# Altium PCB YNM-3000-1.PcbDoc
Units mm, origin at the board's own origin, x right, y up, seen from the top; angles counter-clockwise.
Board outline 136.68 x 73.5 mm, 2 copper layers (Top Layer, Bottom Layer); 35 components, 27 nets, 231 pads, 28 vias.
Unrouted connection lines stored in the file: 3.
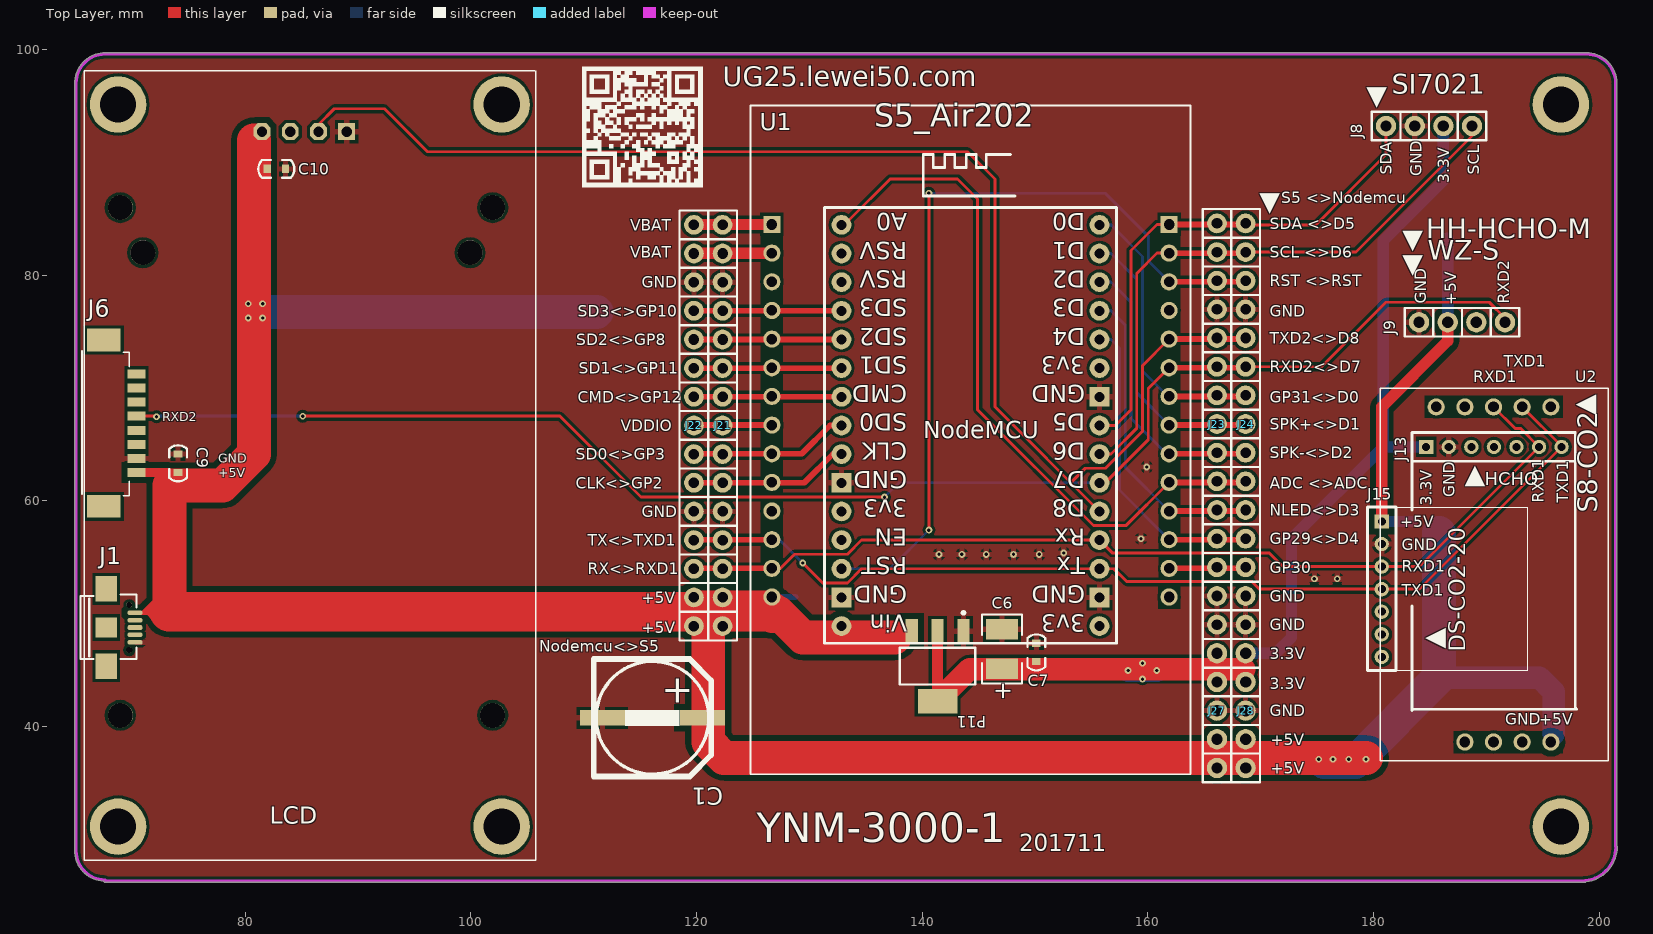
[diagram p0: Top Layer view]
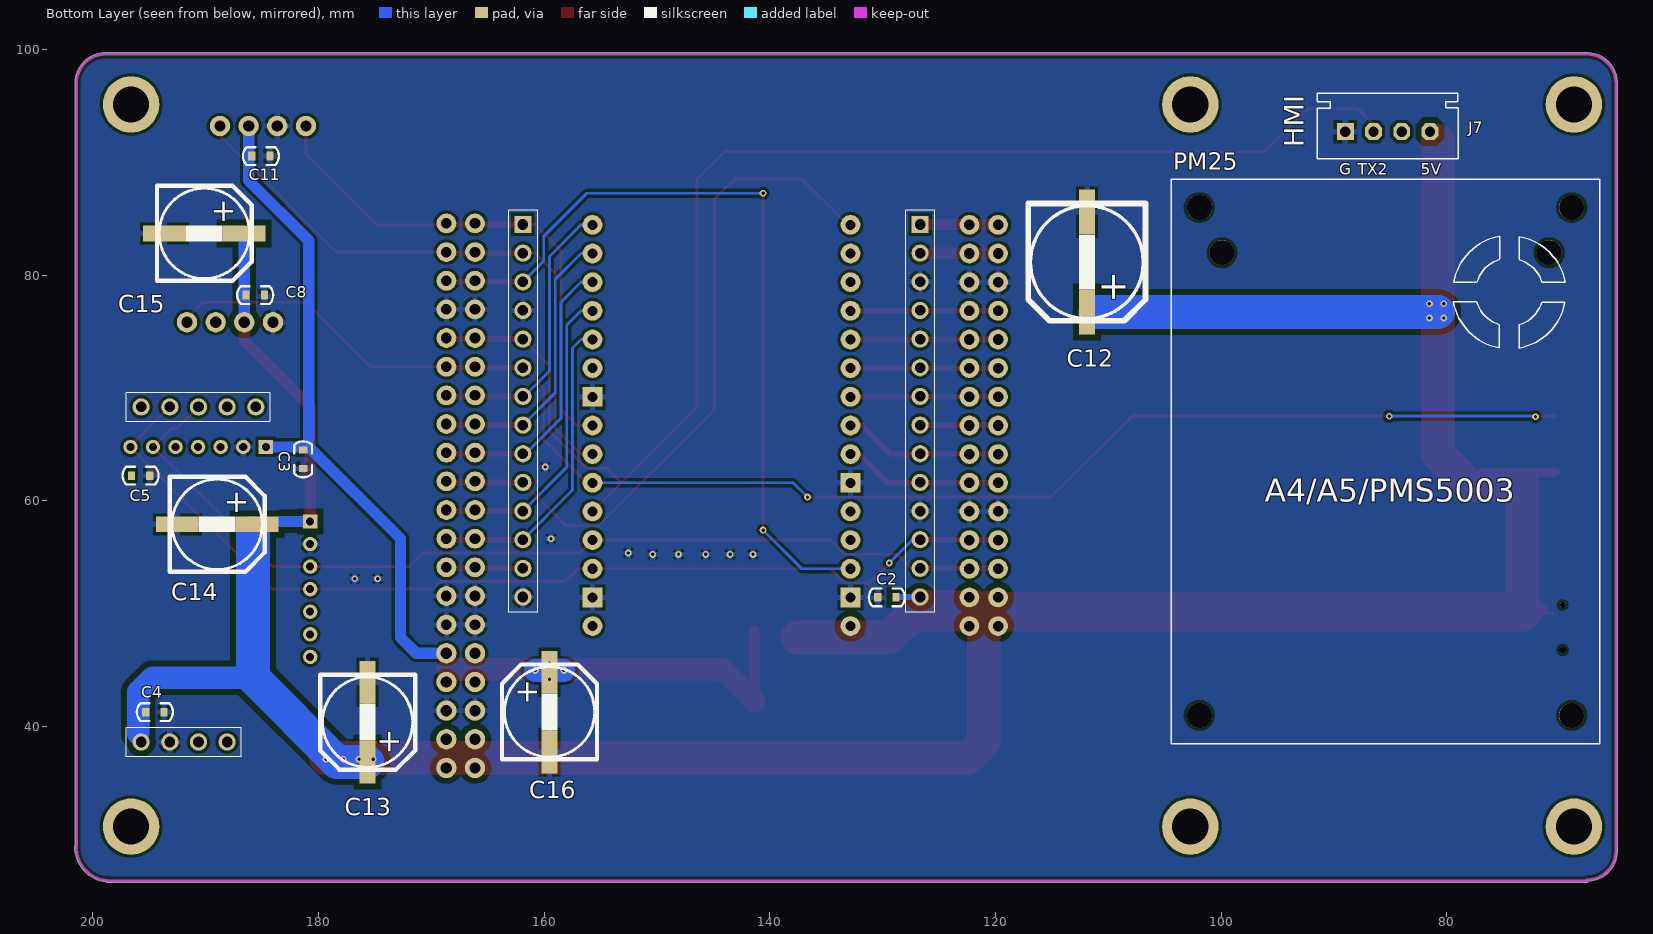
[diagram p1: Bottom Layer view, seen from below]
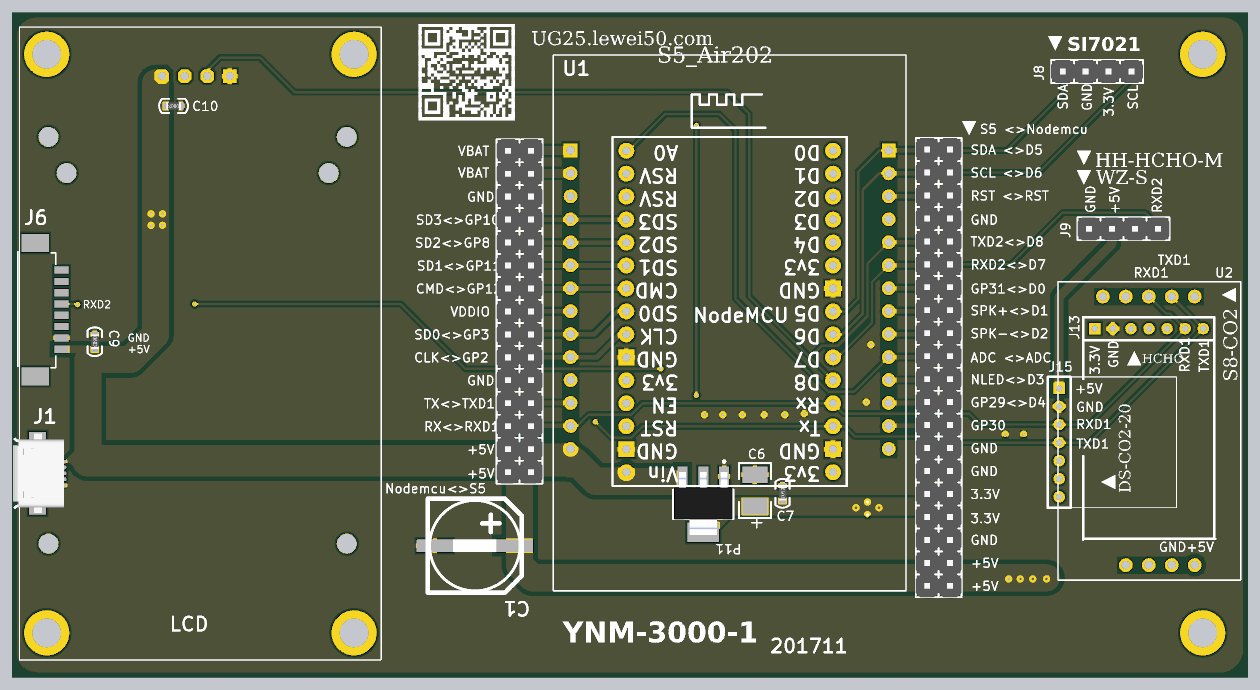
[diagram p2: 3D render of the assembled board from above, using the file's embedded part models]
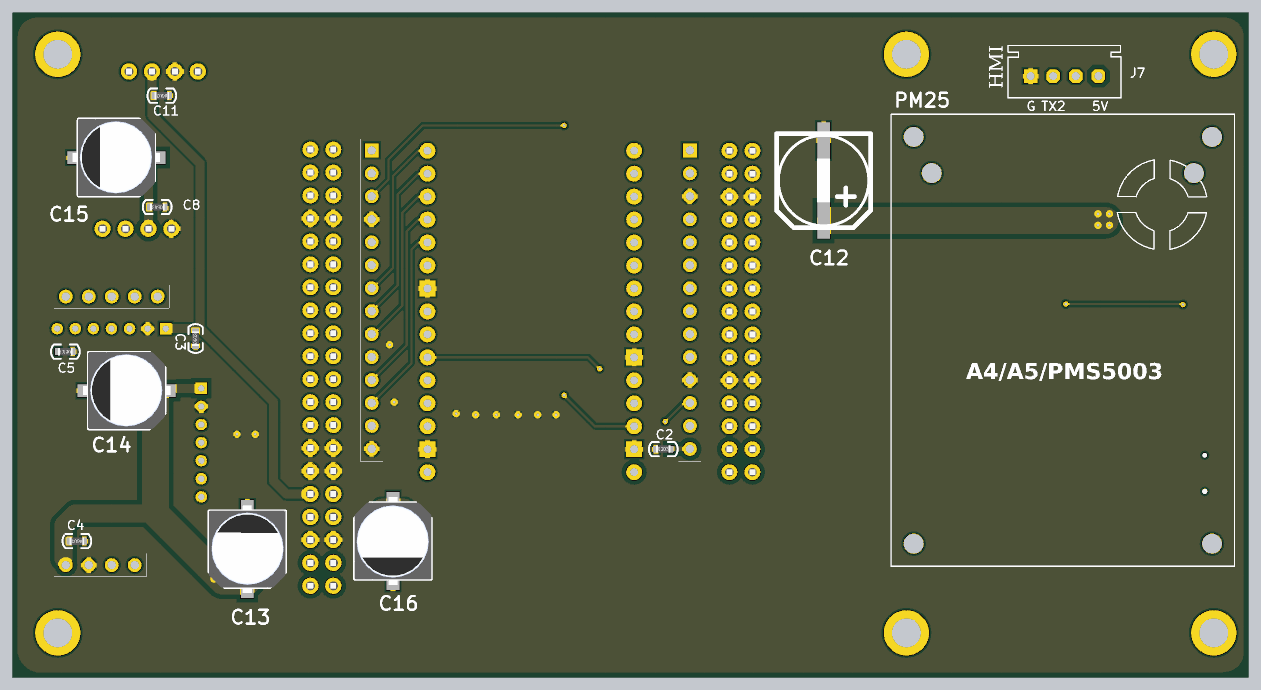
[diagram p3: 3D render of the assembled board from below, using the file's embedded part models]

## Layer stack, top to bottom
Top Solder: solder mask 0.0102, Solder Resist, Dk 3.5
Top Layer: signal copper 0.0356
Dielectric 1: dielectric 0.32, FR-4, Dk 4.8
Bottom Layer: signal copper 0.0356
Bottom Solder: solder mask 0.0102, Solder Resist, Dk 3.5

## Board outline
64.902,28.794 cw(c65.024,28.829) 64.897,28.829 64.897,97.155 cw(c65.024,97.155) 64.902,97.19 cw(c67.564,97.028) 67.402,99.69 cw(c67.437,99.568) 67.437,99.695 198.882,99.695 cw(c198.882,99.568) 198.887,99.695 cw(c198.882,97.028) 201.549,97.085 cw(c201.435,97.028) 201.562,97.028 201.562,29.395 cw(c201.453,29.329) 201.58,29.329 cw(c198.451,29.329) 198.828,26.222 cw(c198.755,26.327) 198.755,26.2 67.564,26.2 cw(c67.564,26.327) 67.442,26.291 cw(c67.564,28.956)

## Design rules (kind name [scope] priority, off if disabled: settings)
Clearance RS485-B2 [InNet('RS485-B')] p1: gap=0.508
Clearance RS485-A2 [InNet('RS485-A')] p2: gap=0.508
Clearance VCC [InNet('+5V') vs InNet('GND')] p3: gap=0.508
Clearance Clear24V [InNet('POW') vs InNet('GND')] p4: gap=0.508
Clearance [All] p5: gap=0.254
HoleSize [All] p1: absolutevalues=TRUE maxlimit=5 minlimit=0.025 maxpercent=80.000 minpercent=20.000
MinimumSolderMaskSliver [All] p1: minsoldermaskwidth=0.2
PolygonConnect [All] p1: connectstyle=Relief reliefconductorwidth=0.508 reliefentries=4 polygonreliefangle="90 Angle" airgapwidth=0.254
RoutingVias [All] p1: holewidth=0.711 width=1.27 viastyle="Through Hole" minholewidth=0.711 minwidth=1.27 maxholewidth=0.711 maxwidth=1.27
SilkToSilkClearance [All] p1: silktosilkclearance=0.17
SilkToSolderMaskClearance [IsPad] p1: minsilkscreentomaskgap=0 clearancetoexposedcopper=TRUE
SolderMaskExpansion [All] p1: expansion=0.102
UnpouredPolygon [All] p1: allowunpoured=FALSE
Width Net1_1 [InNet('NetL1_1')] p1: maxlimit=3 minlimit=0.254 preferedwidth=0.508
Width 5V [InNet('5V')] p2: maxlimit=1.5 minlimit=0.5 preferedwidth=1
Width RXD [InNet('RXD')] p3: maxlimit=1.1 minlimit=0.254 preferedwidth=0.508
Width TXD [InNet('TXD')] p4: maxlimit=1.1 minlimit=0.254 preferedwidth=0.508
Width C-TXD [InNet('C-TXD')] p5: maxlimit=1.1 minlimit=0.254 preferedwidth=0.508
Width C-RXD [InNet('C-RXD')] p6: maxlimit=1.1 minlimit=0.254 preferedwidth=0.508
Width RS485-B [InNet('RS485-B')] p7: maxlimit=1.1 minlimit=0.5 preferedwidth=0.508
Width RS485-A [InNet('RS485-A')] p8: maxlimit=1.1 minlimit=0.5 preferedwidth=0.508
Width RS485-D [InNet('RS485-D')] p9: maxlimit=1.1 minlimit=0.5 preferedwidth=0.508
Width 3.3V [InNet('3.3V')] p10: maxlimit=2 minlimit=0.254 preferedwidth=0.5
Width RAW [InNet('RAW')] p11: maxlimit=3 minlimit=0.508 preferedwidth=1
Width 24V [InNet('24V')] p12: maxlimit=3 minlimit=1 preferedwidth=1
Width GND [InNet('GND')] p13: maxlimit=3 minlimit=0.254 preferedwidth=0.508
Width [All] p14: maxlimit=4 minlimit=0.254 preferedwidth=0.254
25 further rules are at their usual default settings.

## Components (designator, comment, footprint, x,y, rotation, side; value= is the part's Value field where it differs from the comment)
C1 "1000UF" SMD-EC-F10 116.078,40.767 r180 top
C2 "104" CAP-SMD-0603 130.429,51.435 r180 bottom
C3 "104" CAP-SMD-0603 181.356,62.865 r90 bottom
C4 "104" CAP-SMD-0603 193.675,41.275 r0 bottom
C5 "104" CAP-SMD-0603 194.945,62.23 r0 bottom
C6 "106" EC3528B 147.066,46.863 r90 top
C7 "104" CAP-SMD-0603 150.114,47.371 r270 top
C8 "104" CAP-SMD-0603 184.785,78.232 r0 bottom
C9 "104" CAP-SMD-0603 74.041,64.135 r270 top
C10 "104" CAP-SMD-0603 83.566,89.408 r180 top
C11 "104" CAP-SMD-0603 184.277,90.551 r0 bottom
C12 "1000UF" SMD-EC-F10 111.887,81.153 r90 bottom
C13 "470uF/16V" SMD-EC-F8 175.641,40.386 r90 bottom
C14 "470uF/16V" SMD-EC-F8 188.976,57.912 r0 bottom
C15 "470uF/16V" SMD-EC-F8 190.119,83.693 r0 bottom
C16 "470uF/16V" SMD-EC-F8 159.512,41.275 r270 bottom
J1 "USB_M" USB_MICRO 67.691,48.768 r270 top
J6 "DIP-1X08" 1.27*8 70.358,71.247 r270 top
J7 "DIP-1X04" XH-1X04-2.5 88.987,92.71 r180 bottom
J8 "SIP4" DB-1X4 181.102,93.218 r180 top
J9 "SIP4" DB-1X4 184.023,75.819 r180 top
J13 "SIP7_2.0" SIP_2.0_7P 184.658,64.77 r0 top
J15 "SIP7_2.0" SIP_2.0_7P 180.721,58.166 r270 top
J21 "SIP15-1.753" DB-1X15-1.753 122.301,71.755 r270 top
J22 "SIP15-1.753" DB-1X15-1.753 119.761,71.755 r270 top
J23 "SIP15-1.753" DB-1X15-1.753 166.116,71.882 r270 top
J24 "SIP15-1.753" DB-1X15-1.753 168.656,71.882 r270 top
J27 "SIP5" DB-1X5 166.116,41.402 r270 top
J28 "SIP5" DB-1X5 168.656,41.402 r270 top
LCD "LCD" LCD 85.725,63.119 r0 top
NodeMCU "NodeMCU DevKit v1.0" "NodeMCU DevKit v1.0 - Inside Labels" 155.702,48.895 r180 top
P11 "LM1117-3.3" SOT-223 141.351,45.339 r180 top
PM25 "PM25_3" PM25_3 104.421,38.481 r180 bottom
U1 "S5" S5 144.272,69.088 r0 top
U2 "S8-0053" S8-0053 195.707,53.467 r270 top

## Footprints (in the part's own frame and the unit in brackets; to place one, negate y for a bottom-side part, rotate by r counter-clockwise, add the part's x,y. Pads: shape width x height; smd on the part's side, far side on the other; paste and mask are expansions set on the pad)
1.27*8 [mm]
  rect 0.8x1.6 smd: 1(8.75,0) 2(7.5,0) 3(6.25,0) 4(5,0) 5(3.75,0) 6(2.5,0) 7(1.25,0) 8(0,0)
  rect 2x3 smd: ""(-3,-2.9) ""(11.75,-2.9)
  silkscreen extent -2.03,-4.83 10.79,-0.63
CAP-SMD-0603 [mil]
  rect 25x30 smd: 1(0,0) 2(64,0)
  silkscreen extent -31,-31 95,31, body extent 0,-15 63,16, height 18
DB-1X4 [mm]
  round 1.8 hole 1: 1(-7.62,0) 2(-5.08,0) 3(-2.54,0) 4(0,0)
  silkscreen extent -8.89,-1.27 1.27,1.27, body extent -8.89,-1.27 1.27,1.27, height 2.5
DB-1X5 [mm]
  round 1.8 hole 1: 1(-5.08,0) 2(-2.54,0) 3(0,0) 4(2.54,0) 5(5.08,0)
  silkscreen extent -6.35,-1.27 6.35,1.27, body extent -6.35,-1.27 6.35,1.27, height 2.5
DB-1X15-1.753 [mm]
  round 1.753 hole 0.94: 1(-12.7,0) 2(-10.16,0) 3(-7.62,0) 4(-5.08,0) 5(-2.54,0) 6(0,0) 7(2.54,0) 8(5.08,0) 9(7.62,0) 10(10.16,0) 11(12.7,0) 12(15.24,0) 13(17.78,0) 14(20.32,0) 15(22.86,0)
  silkscreen extent -13.97,-1.27 24.13,1.27, body extent -13.97,-1.27 24.13,1.27, height 2.5
EC3528B [mm] "B型钽电容"
  rect 1.8x2.8 smd: 1(-1.75,0) 2(1.75,0)
  silkscreen extent -3.05,-1.78 3.05,1.78
LCD [mm]
  round 5 hole 3.2: ""(-17,-32) ""(-17,32) ""(17,-32) ""(17,32)
  silkscreen extent -20,-35 20,35
"NodeMCU DevKit v1.0 - Inside Labels" [mil]
  round 69 hole 35: 1(0,0) 3(0,-200) 4(0,-300) 5(0,-400) 6(0,-500) 7(0,-600) 8(0,-700) 10(0,-900) 11(0,-1000) 12(0,-1100) 13(0,-1200) 14(0,-1300) 15(0,-1400) 16(900,-1400) 17(900,-1300) 18(900,-1200) 19(900,-1100) 20(900,-1000) 21(900,-900) 22(900,-800) 23(900,-700) 24(900,-600) 26(900,-400) 27(900,-300) 28(900,-200) 30(900,0)
  rect 69x69 hole 35: 2(0,-100) 9(0,-800) 25(900,-500) 29(900,-100)
  silkscreen extent -60,-1460 960,60
PM25_3 [mm]
  round 2.2 hole 2.2: ""(2.5,2.5) ""(2.5,47.5) ""(4.5,43.5) ""(33.5,43.5) ""(35.5,2.5) ""(35.5,47.5)
  silkscreen extent 0,0 38,50
S5 [mil]
  rect 60x60 hole 37: 1(-692.91,606.3) 28(692.91,606.3)
  round 60 hole 37: 2(-692.91,506.3) 3(-692.91,406.3) 4(-692.91,306.3) 5(-692.91,206.3) 6(-692.91,106.3) 7(-692.91,6.3) 8(-692.91,-93.7) 9(-692.91,-193.7) 10(-692.91,-293.7) 11(-692.91,-393.7) 12(-692.91,-493.7) 13(-692.91,-593.7) 14(-692.91,-693.7) 15(692.91,-693.7) 16(692.91,-593.7) 17(692.91,-493.7) 18(692.91,-393.7) 19(692.91,-293.7) 20(692.91,-193.7) 21(692.91,-93.7) 22(692.91,6.3) 23(692.91,106.3) 24(692.91,206.3) 25(692.91,306.3) 26(692.91,406.3) 27(692.91,506.3)
  Top Layer pour cut-out: 654.49,645.67 731.26,645.67 731.26,-735 654.49,-735
  Top Layer pour cut-out: -731.26,645.67 -654.49,645.67 -654.49,-735 -731.26,-735
  silkscreen extent -768,-1312 768,1022
S8-0053 [mil]
  round 60 hole 37: 1(-584.65,0) 2(-584.65,-100) 3(-584.65,-200) 4(-584.65,-300) 5(-584.65,-400) 6(584.65,-300) 7(584.65,-200) 8(584.65,-100) 9(584.65,0)
  Top Layer pour cut-out: 622.99,-339.37 546.22,-339.37 546.22,41.3 622.99,41.3
  Top Layer pour cut-out: -546.22,-439.37 -622.99,-439.37 -622.99,41.3 -546.22,41.3
  silkscreen extent -650,-595 650,200
SIP_2.0_7P [mil]
  rect 50x50 hole 28: 1(0,0)
  round 50 hole 28: 2(78.74,0) 3(157.48,0) 4(236.22,0) 5(314.96,0) 6(393.7,0) 7(472.44,0)
  silkscreen extent -50,-50 520,50
SMD-EC-F8 [mm]
  rect 3.8x1.4 smd: 1(-3.525,0) 2(3.525,0)
  silkscreen extent -4.21,-4.22 4.19,4.2, body extent -4.85,-4.25 4.85,4.25, height 10.5
SMD-EC-F10 [mm]
  rect 4x1.4 smd: 1(-4.43,0) 2(4.43,0)
  silkscreen extent -5.21,-5.2 5.19,5.2
SOT-223 [mm] "SOT-223/SC-73; 4 Leads; Body 6.7 x 7.3 mm, inc. leads (LxW max)"
  rect 1.1x2.15 smd: 1(-2.3,-3.1) 2(0,-3.1) 3(2.3,-3.1)
  rect 3.5x2.15 smd: 4(0,3.1)
  silkscreen extent -3.35,-4.85 3.35,1.63, body extent -3.25,-3.58 3.25,3.38, height 1.65
USB_MICRO [mm] "USB方孔"
  round 0.5 hole 0.5: 0(-2,2.032)
  round 0.5 hole 0.56: 0(2,2.032)
  oct 0.4x1.35 smd: 1(-1.3,2.54) 2(-0.65,2.54) 3(0,2.54) 4(0.65,2.54) 5(1.3,2.54)
  rect 2.286x1.9 smd: 6(3.429,0) 7(-3.429,0)
  rect 1.8x1.9 smd: 8(0,0)
  silkscreen extent -2.92,-2.29 2.79,2.67, body extent -4.4,-2.68 4.4,2.92, height 2.74
XH-1X04-2.5 [mm]
  rect 1.5x1.5 hole 0.9: 1(0,0)
  oct 1.5x1.5 hole 0.9: 2(2.5,0) 3(5,0) 4(7.5,0)
  silkscreen extent -2.5,-2.4 10,3.4

## Part data
C1 C12: library part SMD-EC-F10, "体积（10*10.2MM）"
C2 C3 C4 C5 C7 C8 C9 C10 C11: library part Cap0603, "Cap0603"
C6: library part CAP-3528, "CAP-3528"
C13 C14 C15 C16: library part SMD-EC-F8, "体积（8*10.2MM）"
J1: "Micro/Mini USB"
J6: "Header, 8-Pin"
J7: "Header, 4-Pin"
P11: library part LM1117

## Free pads (board coordinates)
  round 5 hole 3.2: ""(196.596,31.119) ""(196.596,95.119)

## Via types
v1: diameter 0.6, hole 0.3, Top Layer to Bottom Layer, 28 vias

## Nets (pads, with @x,y where several pads share a name; then routed paths per layer and width w, separated by ;. In a path a pad name is that pad's centre, name@x,y a point inside that pad or via, vN(x,y) a via of type N, cw(c..) or ccw(c..) an arc to the next point about the centre after c; other vN are vias at no path point)
+3.3V: C3.2 C5.2 C6.1 C7.2 C11.2 C16.1 J8.2 J13.1 J27.1 J27.2 J28.1 J28.2 P11.2 P11.4 | length 101.5
  Top Layer w1: P11.4 P11.2 ; J27.2 J27.1 ; J28.2 J28.1
  Top Layer w2: P11.4 144.197,45.085 160.782,45.085 168.529,45.085
  Bottom Layer w1: J28.1 171.323,46.482 172.72,47.879 172.72,56.642 180.848,64.77 ; J13.1 180.848,64.77 ; J8.2 186.182,88.392 180.848,83.058 180.848,64.77
  Bottom Layer w2: v1(158.242,44.958) v1(160.782,44.958)
  other v1: 159.512,44.196 159.512,45.593
+5V: C1.1 C2.2 C4.2 C8.2 C9.2 C10.2 C12.1 C13.1 C14.1 C15.1 J1.1 J6.1 J7.4 J9.3 J15.1 J21.14 J21.15 J22.14 J22.15 J27.4 J27.5 J28.4 J28.5 NodeMCU.30 P11.3 U1.14 U2.9 | length 316.3
  Top Layer w0.35: J1.1@70.642,50.068 72.928,50.068 ; J1.1@70.896,50.068 72.136,51.308 ; 71.374,50.038 71.882,49.53
  Top Layer w0.8: J6.1 73.279,62.497
  Top Layer w1: J21.14 122.301,50.165 J21.15 128.397,48.895 NodeMCU.30 ; J27.5 J27.4 ; J15.1 180.721,68.326 186.563,74.168 J9.3
  Top Layer w1.2: J22.14@119.794,51.468 U1.14
  Top Layer w3: 73.279,50.419 73.279,61.341 77.978,61.341 80.772,64.135 80.772,91.948 ; 121.031,50.165 121.031,38.608 122.428,37.211 v1@179.324,37.211 ; 126.746,50.038 127.254,50.038 128.397,48.895 129.413,47.879 137.541,47.879
  Top Layer w3.5: 73.279,50.165 122.301,50.165 126.619,50.165 126.746,50.038
  Bottom Layer w0.508: U1.14 C2.2@128.77,51.468
  Bottom Layer w1: J15.1 183.388,58.166 ; J9.3 C15.1@186.563,83.281
  Bottom Layer w2: 185.801,44.323 194.691,44.323 195.961,43.053 195.961,39.37
  Bottom Layer w3: 80.757,76.723 111.125,76.723 ; C13.1 178.339,36.861 185.801,44.323 185.801,57.15
  other v1: 175.133,37.084 176.403,37.084 177.8,37.084 179.324,37.084 80.264,76.2 81.534,76.2 80.264,77.47 81.534,77.47
ADC: J23.10 J24.10 NodeMCU.16 U1.19 | length 62.2
  Top Layer w0.254: NodeMCU.16@133.512,84.455 133.512,84.871 137.16,88.519 143.129,88.519 144.907,86.741 144.907,68.072 155.181,57.798 158.016,57.798 158.029,57.785 U1.19
  Top Layer w0.508: U1.19 J24.10@168.562,61.628
CLK: J21.10 J22.10 NodeMCU.24 U1.10 | length 14.1
  Top Layer w0.508: J22.10 J21.10 129.54,61.595 132.08,64.135 NodeMCU.24
CMD: J21.7 J22.7 NodeMCU.22 U1.7 | length 13.1
  Top Layer w0.508: J22.7 J21.7 NodeMCU.22
D0: J23.7 J24.7 NodeMCU.15 U1.22 | length 25.1
  Top Layer w0.508: U1.22 J24.7@168.562,69.248
  Bottom Layer w0.254: NodeMCU.15 156.718,84.455 159.512,81.661 159.512,71.501 U1.22@161.819,69.194
D1: J23.8 J24.8 NodeMCU.14 U1.21 | length 25
  Top Layer w0.508: U1.21 J24.8@168.562,66.708
  Bottom Layer w0.254: NodeMCU.14 156.718,81.915 159.004,79.629 159.004,69.576 U1.21
D2: J23.9 J24.9 NodeMCU.13 U1.20 | length 25.4
  Top Layer w0.508: U1.20 J24.9@168.562,64.168
  Bottom Layer w0.254: NodeMCU.13 156.718,79.375 158.496,77.597 158.496,67.31 U1.20@161.925,63.881
D3: J23.11 J24.11 NodeMCU.12 U1.18 | length 27.6
  Top Layer w0.508: U1.18 J24.11@168.562,59.088
  Bottom Layer w0.254: NodeMCU.12 156.718,76.835 157.988,75.565 157.988,62.972 U1.18
EN: NodeMCU.27
GND: C1.2 C2.1 C3.1 C4.1 C5.1 C6.2 C7.1 C8.1 C9.1 C10.1 C11.1 C12.2 C13.2 C14.2 C15.2 C16.2 J1.5 J6.2 J7.1 J8.3 J9.4 J13.2 J15.2 J21.3 J21.11 J22.3 J22.11 J23.4 J23.14 J23.15 J24.4 J24.14 J24.15 J27.3 J28.3 NodeMCU.2 NodeMCU.9 NodeMCU.25 NodeMCU.29 P11.1 U1.3 U1.11 U1.15 U1.25 U2.8
  other v1: 174.752,53.086 176.784,53.086 141.478,55.245 143.51,55.245 145.669,55.245 148.082,55.245 150.368,55.245 152.527,55.372 159.385,56.642 159.893,62.992
GP3: J21.9 J22.9 NodeMCU.23 U1.9 | length 14.1
  Top Layer w0.508: J22.9@119.794,64.168 U1.9 129.319,64.168 131.826,66.675 NodeMCU.23
GPIO29: J23.12 J24.12 NodeMCU.11 U1.17 | length 27.6
  Top Layer w0.508: U1.17 J24.12@168.562,56.548
  Bottom Layer w0.254: NodeMCU.11 156.718,74.295 157.48,73.533 157.48,60.94 U1.17
GPIO30: J23.13 J24.13 U1.16 | length 6.7
  Top Layer w0.508: U1.16 J24.13@168.562,54.008
RST: J23.3 J24.3 NodeMCU.28 U1.26 | length 71.5
  Top Layer w0.254: v1(140.589,57.404) v1(140.589,87.249)
  Top Layer w0.508: U1.26 J24.3@168.562,79.408
  Bottom Layer w0.254: NodeMCU.28 137.16,53.975 v1(140.589,57.404) ; v1(140.589,87.249) 156.219,87.249 160.02,83.448 160.02,81.26 U1.26
RSV: NodeMCU.17 NodeMCU.18
RXD1: J13.6 J15.3 J21.13 J22.13 NodeMCU.4 U1.13 U2.3 | length 86.8
  Top Layer w0.254: U1.13 127.414,54.008 128.664,55.258 133.363,55.258 134.62,56.515 NodeMCU.4 156.828,55.389 ; 156.828,55.372 170.752,55.372 171.958,54.166 J15.3 184.054,54.166 J13.6 193.007,66.421 192.523,66.421 U2.3 ; J13.6@194.301,64.643 J13.6@194.31,64.643
  Top Layer w0.508: J22.13@119.794,54.008 U1.13
RXD2: J6.5 J9.1 J23.6 J24.6 NodeMCU.6 U1.23 | length 134.8
  Top Layer w0.254: J6.5 v1@72.076,67.497 ; v1(85.09,67.497) 107.89,67.497 115.062,60.325 v1(136.652,60.325) ; NodeMCU.6 156.21,61.595 160.02,65.405 160.02,69.936 U1.23 ; J24.6 175.387,71.882 181.102,77.597 190.246,77.597 191.643,76.2 J9.1
  Top Layer w0.508: U1.23 J24.6@168.562,71.788
  Bottom Layer w0.254: v1@72.196,67.497 v1(85.09,67.497) ; v1(136.652,60.325) 137.922,61.595 NodeMCU.6
  other v1: 72.136,67.437
SCL: J8.1 J23.2 J24.2 NodeMCU.7 U1.27 | length 53.5
  Top Layer w0.254: NodeMCU.7 156.718,64.135 159.004,66.421 159.004,80.137 160.815,81.948 U1.27 ; J24.2 178.435,82.042 188.722,92.329 J8.1
  Top Layer w0.508: U1.27 J24.2@168.562,81.948
SD1: J21.6 J22.6 NodeMCU.21 U1.6 | length 13.1
  Top Layer w0.508: J22.6 J21.6 NodeMCU.21
SD2: J21.5 J22.5 NodeMCU.20 U1.5 | length 13.1
  Top Layer w0.508: J22.5 J21.5 NodeMCU.20
SD3: J21.4 J22.4 NodeMCU.19 U1.4 | length 13.1
  Top Layer w0.508: J22.4 J21.4 NodeMCU.19
SDA: J8.4 J23.1 J24.1 NodeMCU.8 U1.28 | length 46.1
  Top Layer w0.254: NodeMCU.8 157.099,66.675 158.496,68.072 158.496,82.169 160.815,84.488 U1.28 ; J24.1@168.595,84.455 174.879,84.455 181.102,90.678 J8.4
  Top Layer w0.508: U1.28 J24.1@168.562,84.488
TXD1: J13.7 J15.4 J21.12 J22.12 NodeMCU.3 U1.12 U2.2 | length 89.9
  Top Layer w0.254: v1(129.413,54.483) 131.178,52.718 133.363,52.718 134.62,53.975 NodeMCU.3 156.972,53.975 158.115,52.832 169.198,52.832 169.864,52.166 J15.4 184.054,52.166 J13.7 ; U2.2 J13.7@196.686,64.798
  Top Layer w0.508: J22.12@119.794,56.548 U1.12
  Bottom Layer w0.254: U1.12 127.348,56.548 v1(129.413,54.483)
TXD2: J7.2 J23.5 J24.5 NodeMCU.5 U1.24 | length 121.1
  Top Layer w0.254: J7.2 86.487,93.345 87.884,94.742 92.329,94.742 96.139,90.932 144.018,90.932 146.431,88.519 146.431,68.326 NodeMCU.5 ; 153.162,61.595 154.445,62.878 156.223,62.878 159.512,66.167 159.512,71.968 U1.24
  Top Layer w0.508: U1.24 J24.5@168.562,74.328
VBAT: J21.1 J21.2 J22.1 J22.2 U1.1 U1.2 | length 13.8
  Top Layer w1: J22.2@119.794,81.948 U1.2 ; J22.1@119.794,84.488 U1.1
VDDIO: J21.8 J22.8 U1.8 | length 6.9
  Top Layer w0.508: J22.8@119.794,66.708 U1.8
pads on no net: J1.0 J1.2 J1.3 J1.4 J1.6 J1.7 J1.8 J6. J6.3 J6.4 J6.6 J6.7 J6.8 J7.3 J9.2 J13.3 J13.4 J13.5 J15.5 J15.6 J15.7 LCD. NodeMCU.1 NodeMCU.10 NodeMCU.26 PM25. U2.1 U2.4 U2.5 U2.6 U2.7

## Polygon pours and split planes (outlines as drawn)
GND on Bottom Layer "Bottom Layer-No Net" (solid, remove dead copper, pour order 6): 209.55,103.886 209.169,104.267 59.436,104.267 59.436,15.748 57.531,13.843 61.976,18.288 210.947,18.288
GND on Top Layer "Bottom Layer-No Net" (solid, remove dead copper, pour order 8): 56.261,103.378 207.645,103.378 208.661,104.394 206.629,102.362 206.629,19.177 60.96,19.177 58.42,16.637

## Keep-outs
Keep-Out Layer:
  lines w0.254: 65.024,28.829 65.024,97.155 ; 65.024,28.956 ccw(c67.564,28.956) 67.564,26.416 ; 65.024,97.028 cw(c67.564,97.028) 67.564,99.568 ; 67.437,99.568 198.882,99.568 cw(c198.882,97.028) 201.422,97.028 ; 67.564,26.327 198.755,26.327 ; 198.451,26.327 ccw(c198.451,29.329) 201.453,29.329 ; 201.435,29.329 201.435,97.028

## Other copper
Top Layer:
  rectangle net +5V: 71.247,49.911 71.882,50.673

## Silkscreen, mask and mechanical layers (free items; w line width, h text height)
Top Overlay:
  drawing of 2257 lines, arcs and shapes, not listed
  text "▲" at 181.229,96.901 h3 r180
  text "UG25.lewei50.com" at 122.301,96.139 h3
  text "SI7021" at 181.61,95.504 h3
  text "S5_Air202" at 135.763,92.456 h3.5
  text "SDA" at 181.61,88.9 h1 r90
  text "SCL" at 189.357,88.9 h1 r90
  text "GND" at 184.277,88.773 h1 r90
  text "3.3V" at 186.69,88.138 h1 r90
  text "▲" at 171.704,87.503 h3 r180
  text "S5 <>Nodemcu" at 171.831,86.36 h1
  text "▲" at 184.404,84.201 h3 r180
  text "SDA <>D5" at 170.815,84.074 h1
  text "VBAT" at 114.117,83.947 h1
  text "HH-HCHO-M" at 184.658,82.677 h3
  text "▲" at 184.404,82.042 h3 r180
  text "VBAT" at 114.117,81.534 h1
  text "SCL <>D6" at 170.815,81.534 h1
  text "WZ-S" at 184.785,80.772 h3
  text "RST <>RST" at 170.815,78.994 h1
  text "GND" at 115.117,78.867 h1
  text "GND" at 184.658,77.47 h1 r90
  text "RXD2" at 192.024,77.47 h1 r90
  text "+5V" at 187.325,77.343 h1 r90
  text "SD3<>GP10" at 109.452,76.327 h1
  text "GND" at 170.815,76.327 h1
  text "TXD2<>D8" at 170.815,73.914 h1
  text "SD2<>GP8" at 109.347,73.787 h1
  text "TXD1" at 191.516,71.882 h1
  text "RXD2<>D7" at 170.815,71.374 h1
  text "SD1<>GP11" at 109.571,71.247 h1
  text "RXD1" at 188.849,70.485 h1
  text "CMD<>GP12" at 109.452,68.707 h1
  text "GP31<>D0" at 170.815,68.707 h1
  text "▲" at 200.025,67.564 h3 r90
  text "RXD2" at 72.644,67.056 h0.8
  text "SPK+<>D1" at 170.815,66.294 h1
  text "VDDIO" at 113.284,66.167 h1
  text "SPK-<>D2" at 170.815,63.754 h1
  text "SD0<>GP3" at 109.269,63.627 h1
  text "GND" at 77.597,63.373 h0.8
  text "+5V" at 77.597,62.103 h0.8
  text "CLK<>GP2" at 109.269,61.087 h1
  text "ADC <>ADC" at 170.815,61.087 h1
  text "▲" at 188.087,60.96 h3
  text "HCHO" at 189.865,60.96 h2
  text "GND" at 187.198,60.325 h1 r90
  text "RXD1" at 195.072,59.817 h1 r90
  text "TXD1" at 197.231,59.817 h1 r90
  text "3.3V" at 185.166,59.563 h1 r90
  text "S8-CO2" at 200.406,58.928 h3 r90
  text "NLED<>D3" at 170.815,58.674 h1
  text "GND" at 115.117,58.547 h1
  text "+5V" at 182.372,57.658 h1
  text "GP29<>D4" at 170.815,56.134 h1
  text "TX<>TXD1" at 110.364,56.007 h1
  text "GND" at 182.499,55.626 h1
  text "RXD1" at 182.499,53.721 h1
  text "GP30" at 170.815,53.594 h1
  text "RX<>RXD1" at 110.364,53.467 h1
  text "TXD1" at 182.499,51.562 h1
  text "GND" at 170.815,51.054 h1
  text "+5V" at 115.117,50.927 h1
  text "GND" at 170.815,48.514 h1
  text "+5V" at 115.117,48.26 h1
  text "▲" at 186.69,46.863 h3 r90
  text "Nodemcu<>S5" at 106.045,46.609 h1
  text "DS-CO2-20" at 188.595,46.609 h2.5 r90
  text "3.3V" at 170.815,45.974 h1
  text "3.3V" at 170.815,43.307 h1
  text "GND" at 170.815,40.894 h1
  text "GND" at 191.643,40.132 h1
  text "+5V" at 194.691,40.132 h1
  text "+5V" at 170.87,38.354 h1
  text "+5V" at 170.87,35.814 h1
  text "201711" at 148.59,28.956 h1.5
  text "YNM-3000-1" at 125.349,28.829 h4.5
Bottom Overlay:
  text "HMI" at 92.075,91.313 h3 r270
  text "5V" at 82.296,88.9 h1
  text "TX2" at 87.884,88.9 h1
  text "G" at 89.535,88.9 h1
  text "A4/A5/PMS5003" at 96.139,59.182 h3.5

## Text inside footprints (layer, text, board x,y; h text height)
C1: Top Overlay "+" at 119.727,44.207 h2.5 r180
C6: Top Overlay "+" at 147.828,42.291 h1.5 r90
C12: Bottom Overlay "+" at 108.447,77.504 h2.5 r270
C13: Bottom Overlay "+" at 172.823,37.501 h2 r270
C14: Bottom Overlay "+" at 186.091,60.73 h2 r180
C15: Bottom Overlay "+" at 187.234,86.511 h2 r180
C16: Bottom Overlay "+" at 162.33,44.16 h2 r90
NodeMCU: Top Overlay "Vin" at 138.684,49.911 h1.52 r180; Top Overlay "GND" at 138.684,52.451 h1.52 r180; Top Overlay "RST" at 138.684,54.991 h1.52 r180; Top Overlay "EN" at 138.684,57.531 h1.52 r180; Top Overlay "3v3" at 138.684,60.071 h1.52 r180; Top Overlay "GND" at 138.684,62.611 h1.52 r180; Top Overlay "CLK" at 138.684,65.151 h1.52 r180; Top Overlay "SD0" at 138.684,67.691 h1.52 r180; Top Overlay "CMD" at 138.684,70.231 h1.52 r180; Top Overlay "SD1" at 138.684,72.771 h1.52 r180; Top Overlay "SD2" at 138.684,75.311 h1.52 r180; Top Overlay "SD3" at 138.684,77.851 h1.52 r180; Top Overlay "RSV" at 138.684,80.391 h1.52 r180; Top Overlay "RSV" at 138.684,82.931 h1.52 r180; Top Overlay "A0" at 138.684,85.471 h1.52 r180; Top Overlay "D0" at 154.432,85.471 h1.52 r180; Top Overlay "D1" at 154.432,82.931 h1.52 r180; Top Overlay "D2" at 154.432,80.391 h1.52 r180; Top Overlay "D3" at 154.432,77.851 h1.52 r180; Top Overlay "D4" at 154.432,75.311 h1.52 r180; Top Overlay "3v3" at 154.432,72.771 h1.52 r180; Top Overlay "GND" at 154.432,70.231 h1.52 r180; Top Overlay "D5" at 154.432,67.691 h1.52 r180; Top Overlay "D6" at 154.432,65.151 h1.52 r180; Top Overlay "D7" at 154.432,62.611 h1.52 r180; Top Overlay "D8" at 154.432,60.071 h1.52 r180; Top Overlay "Rx" at 154.432,57.531 h1.52 r180; Top Overlay "Tx" at 154.432,54.991 h1.52 r180; Top Overlay "GND" at 154.432,52.451 h1.52 r180; Top Overlay "3v3" at 154.432,49.911 h1.52 r180